# Altium PCB TvRRelayBoard_v2.PcbDoc
Units mil, origin at the board's own origin, x right, y up, seen from the top; angles counter-clockwise.
Board outline 2935 x 3395 mil, 2 copper layers (Top Layer, Bottom Layer); 29 components, 24 nets, 90 pads, 0 vias.
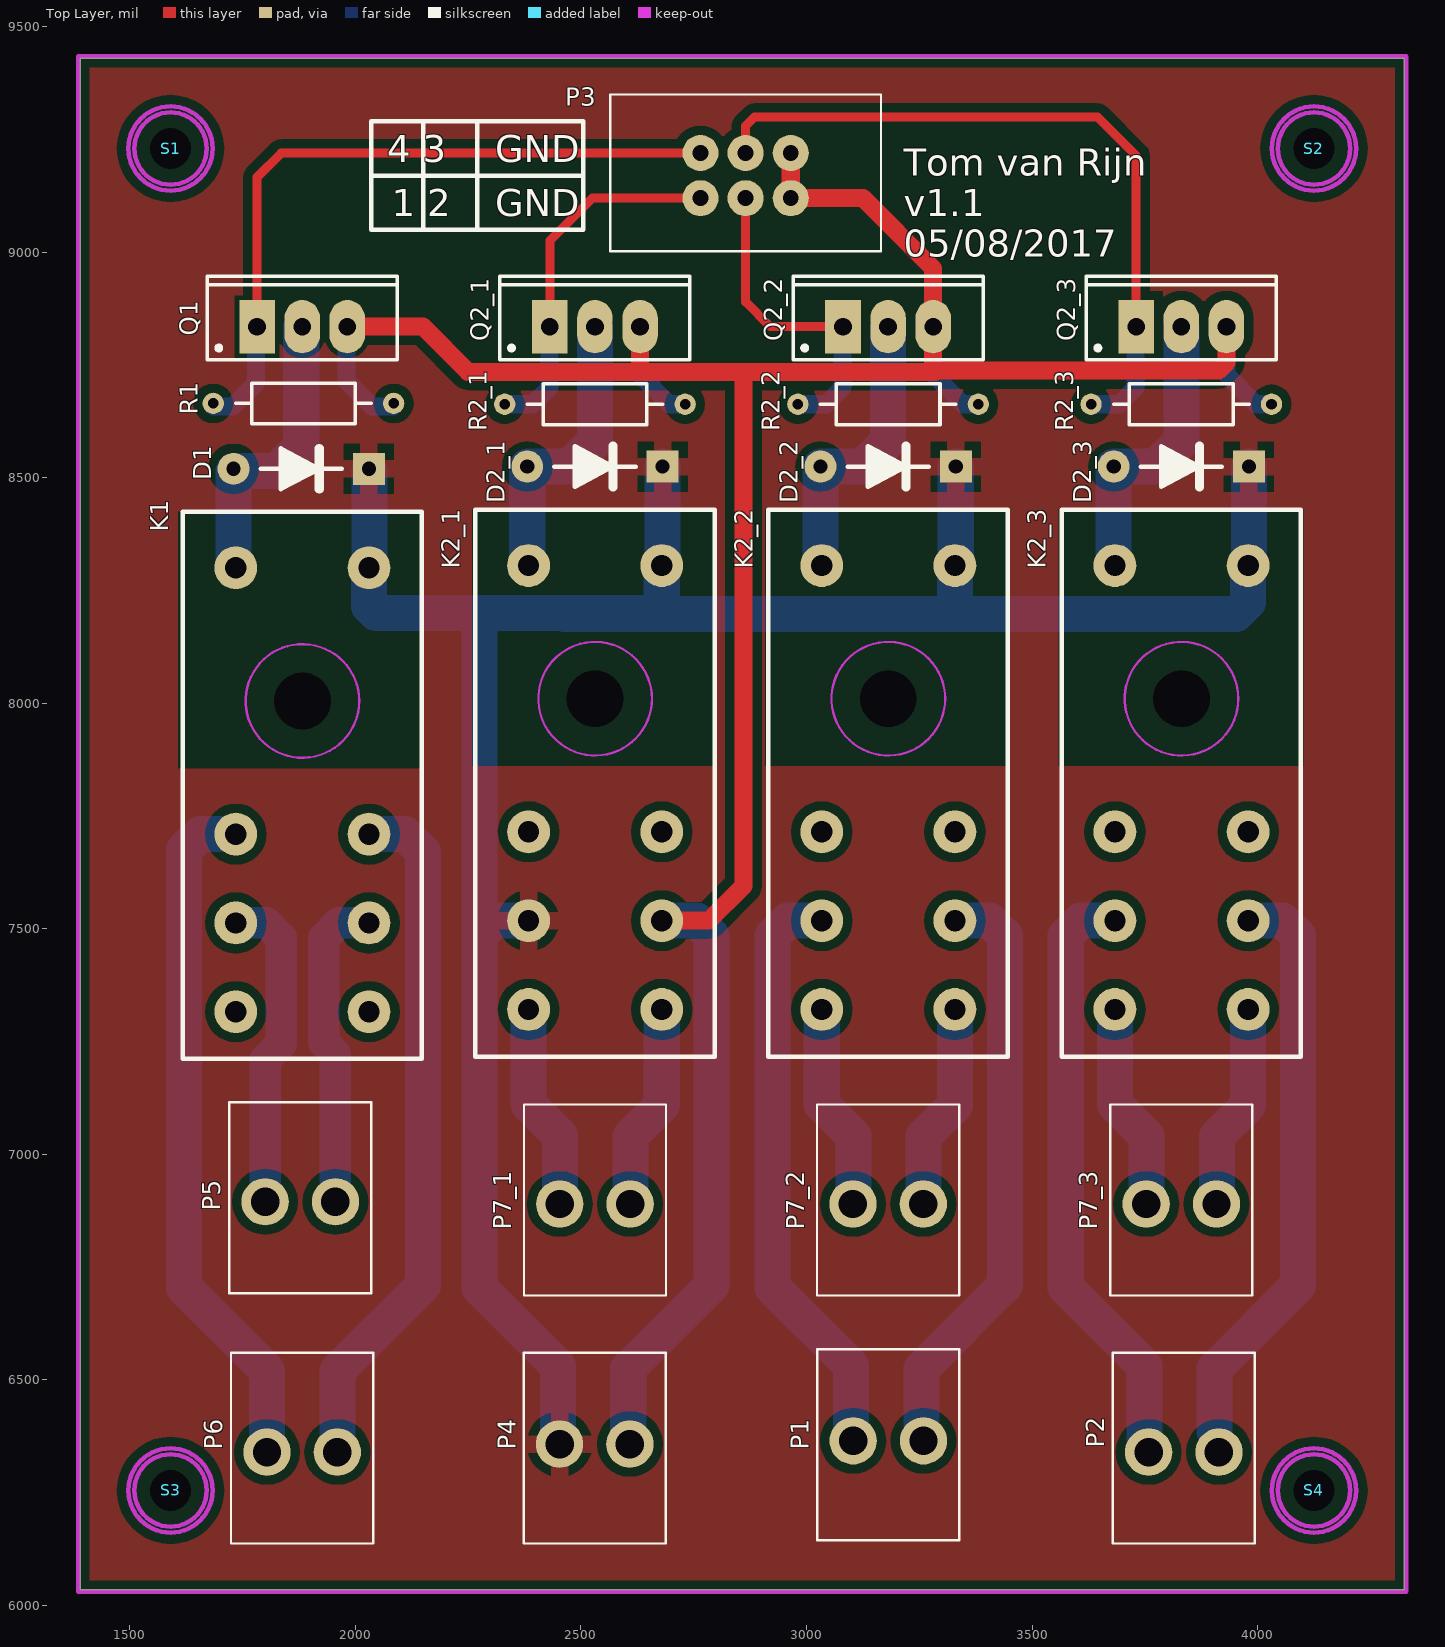
[diagram p0: Top Layer view]
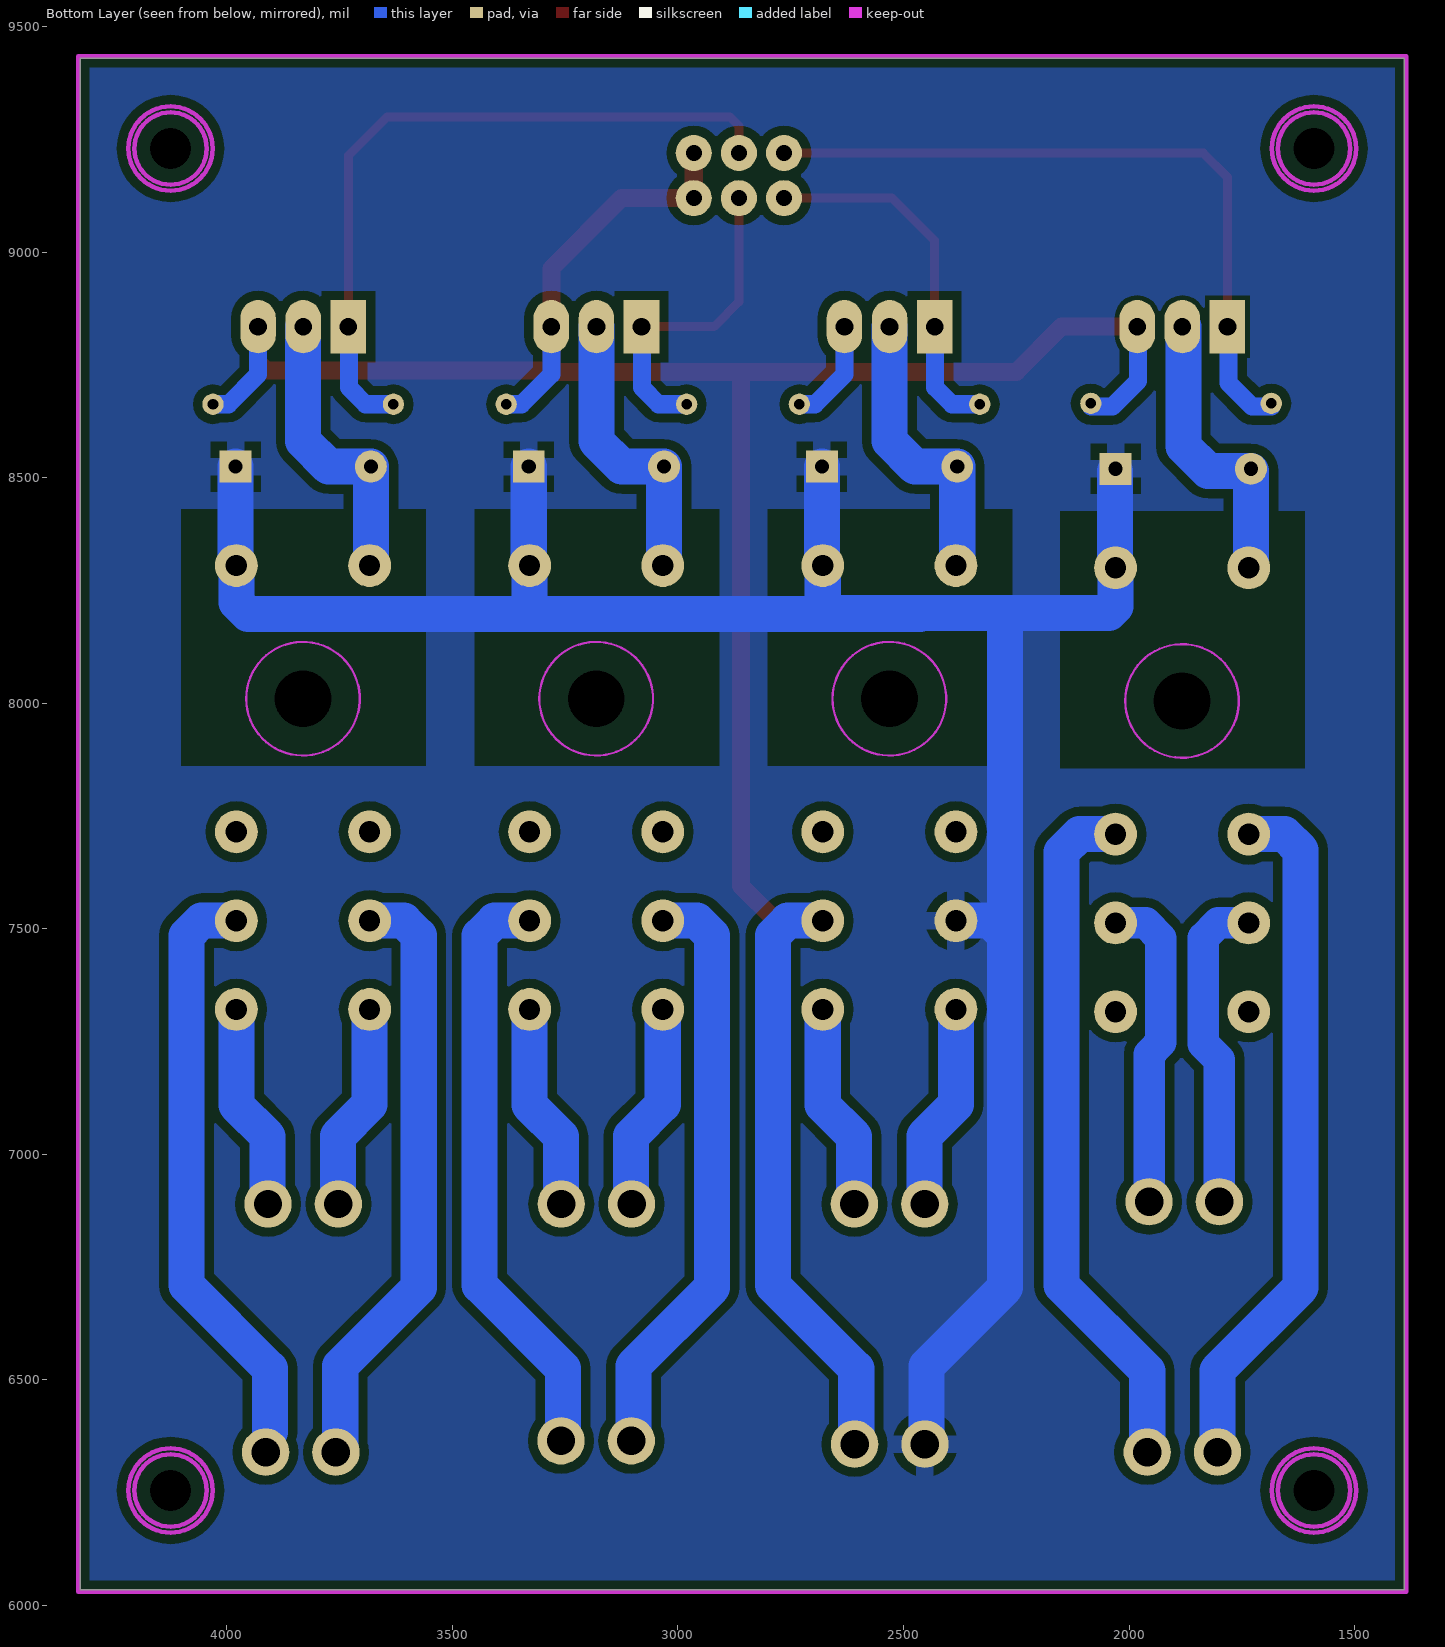
[diagram p1: Bottom Layer view, seen from below]
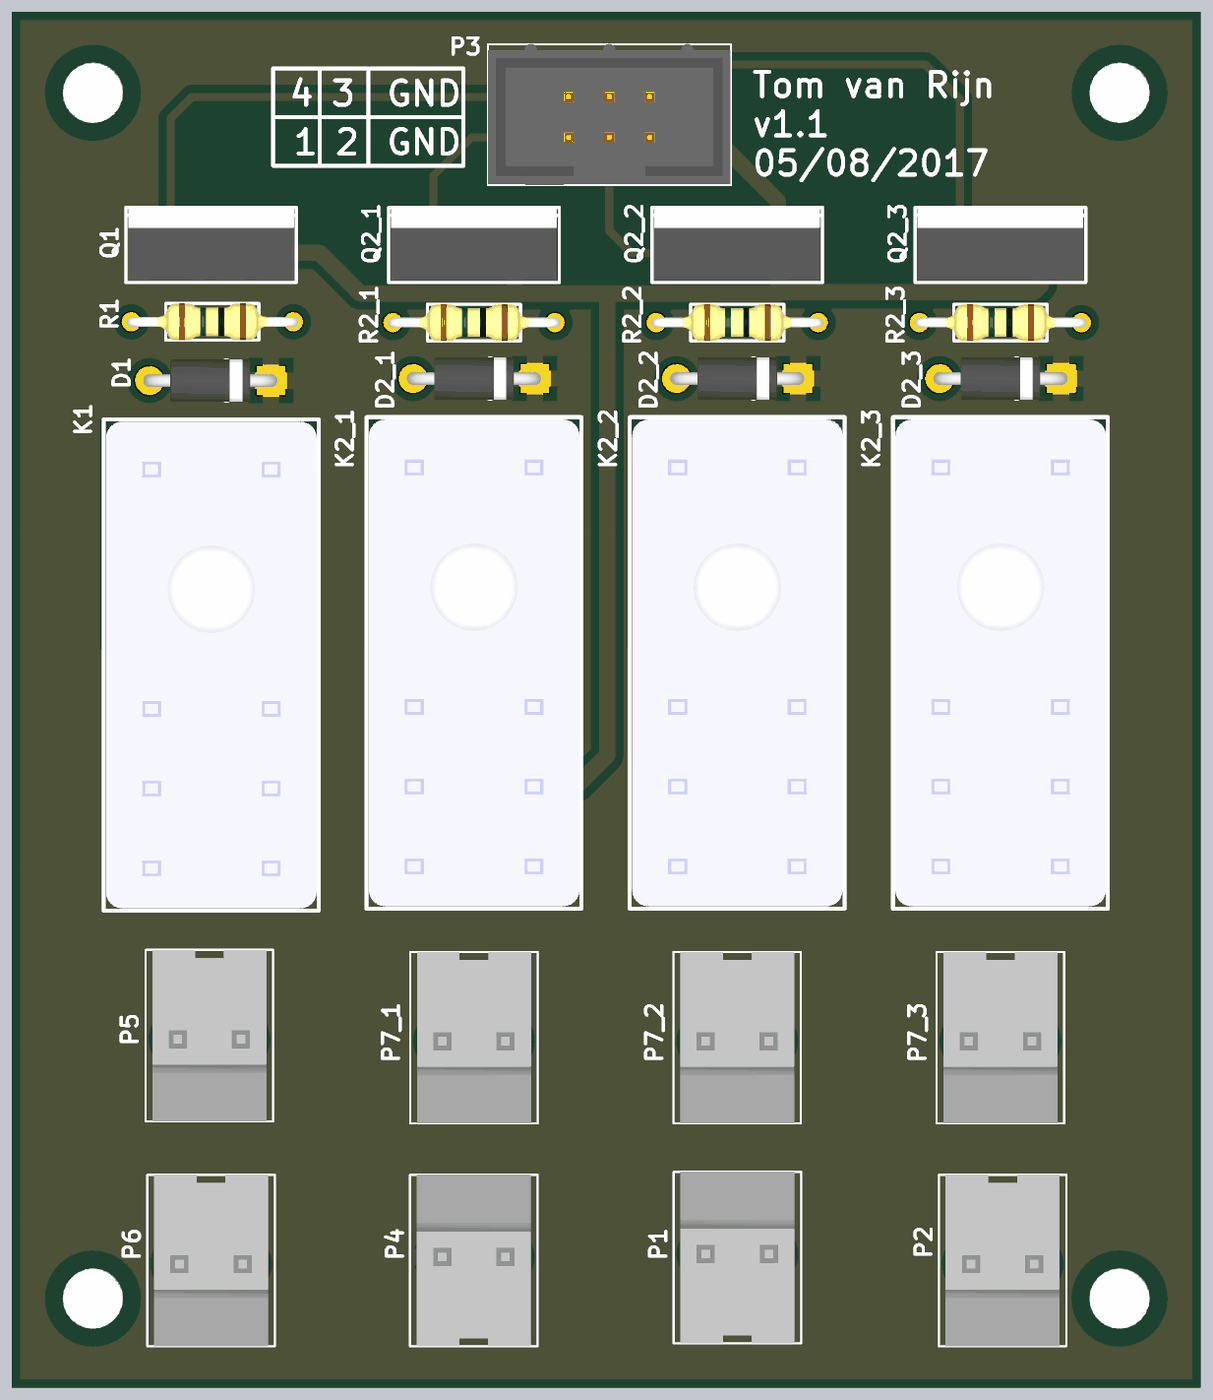
[diagram p2: 3D render of the assembled board from above, using the file's embedded part models]

## Layer stack, top to bottom
Top Solder: solder mask 0.4, Solder Resist, Dk 3.5
Top Layer: signal copper 1.4
Dielectric 1: dielectric 12.6, FR-4, Dk 4.8
Bottom Layer: signal copper 1.4
Bottom Solder: solder mask 0.4, Solder Resist, Dk 3.5

## Board outline
1390,6035 4325,6035 4325,9430 1390,9430

## Design rules (kind name [scope] priority, off if disabled: settings)
Clearance "Clearance MOSFET" [InComponent('Q1*')] p1: gap=10 ignorepadtopadclearanceinfootprint=FALSE except(0: Arc-Hole Track-Hole SMDPad-Hole THPad-Hole Via-Hole Fill-Hole Poly-Hole Region-Hole Text-Hole)
Clearance [All] p2: gap=20 ignorepadtopadclearanceinfootprint=FALSE except(18: Arc-Track Track-THPad)
HoleSize [All] p1: absolutevalues=TRUE maxlimit=157.48 minlimit=5.98 maxpercent=80.000 minpercent=20.000
MinimumSolderMaskSliver [All] p1: minsoldermaskwidth=0
PlaneConnect [All] p1: planeconnectstyle=Relief reliefexpansion=20 reliefentries=4 reliefconductorwidth=40 reliefairgap=20
PolygonConnect [All] p1: connectstyle=Relief reliefconductorwidth=40 reliefentries=4 polygonreliefangle="90 Angle" airgapwidth=20
RoomDefinition Relay_Conn [InComponentClass('Relay_Conn')] p1: confinementstyle=ConfineIn formatcopy=TRUE lockcomponents=FALSE outline 1390,6035 4320,6035 4320,9430 1390,9430
RoomDefinition R_NC [InComponentClass('R_NC')] p2: confinementstyle=ConfineIn formatcopy=TRUE lockcomponents=FALSE outline 1598.39,6125 2168.39,6125 2168.39,8960 1598.39,8960
RoomDefinition P3 [InComponentClass('P3')] p3: confinementstyle=ConfineIn formatcopy=TRUE lockcomponents=FALSE outline 3548.39,6125 4118.39,6125 4118.39,8960 3548.39,8960
RoomDefinition P2 [InComponentClass('P2')] p4: confinementstyle=ConfineIn formatcopy=TRUE lockcomponents=FALSE outline 2898.39,6125 3468.39,6125 3468.39,8960 2898.39,8960
RoomDefinition P1 [InComponentClass('P1')] p5: confinementstyle=ConfineIn formatcopy=TRUE lockcomponents=FALSE outline 2248.39,6125 2818.39,6125 2818.39,8960 2248.39,8960
RoutingVias [All] p1: holewidth=28 width=50 viastyle="Through Hole" minholewidth=28 minwidth=50 maxholewidth=28 maxwidth=50
SilkToSilkClearance [All] p1: silktosilkclearance=0
SilkToSolderMaskClearance [IsPad] p1: minsilkscreentomaskgap=0 clearancetoexposedcopper=TRUE
SolderMaskExpansion [All] p1: expansion=4
Width LED [InNetClass('LED')] p1 off: maxlimit=40 minlimit=20 preferedwidth=20
Width H-Bridge [InComponent('IC-Multiwatt-15')] p2 off: maxlimit=20 minlimit=20 preferedwidth=20
Width Fiducials-Width [HasFootprint('MECH-FID-ALL')] p3 off: maxlimit=10 minlimit=2 preferedwidth=10
Width Power [InNetClass('Power')] p4: maxlimit=80 minlimit=25 preferedwidth=80
Width [All] p5: maxlimit=40 minlimit=20 preferedwidth=20
25 further rules are at their usual default settings.

## Classes and differential pairs
channel class Relay_Schem_NO: P1 P2 P3
net class S[1..3]: S1 S2 S3 S4
net class Power: Drain Drain_1 Drain_2 Drain_3 GNDout_1 GNDout_2 GNDout_3 Vin1 Vin2 Vin2_1 VIN11 VIN12 VIN13 VIN21 VIN22 VIN23 Vout1 Vout2 Vout_1 Vout_2 Vout_3
component class Relay_Conn: P1 P2 P3 P4 S1 S2 S3 S4
component class R_NC: D1 K1 P5 P6 Q1 R1
component class P3: D2_3 K2_3 P7_3 Q2_3 R2_3
component class P2: D2_2 K2_2 P7_2 Q2_2 R2_2
component class P1: D2_1 K2_1 P7_1 Q2_1 R2_1

## Components (designator, comment, footprint, x,y, rotation, side; value= is the part's Value field where it differs from the comment)
D1 "1N4004" DIODE-0.3-SI 1879.72,8520 r0 top
D2_1 "1N4004" DIODE-0.3-SI 2530.87,8525 r0 top (schematic designator D2)
D2_2 "1N4004" DIODE-0.3-SI 3180.87,8525 r0 top (schematic designator D2)
D2_3 "1N4004" DIODE-0.3-SI 3830.87,8525 r0 top (schematic designator D2)
K1 "Relay-DPDT" "Relay_95.12 Socket - With Screw" 2030,7513.15 r270 top
K2_1 "Relay-DPDT" "Relay_95.12 Socket - With Screw" 2679,7518.15 r270 top (schematic designator K2)
K2_2 "Relay-DPDT" "Relay_95.12 Socket - With Screw" 3329,7518.15 r270 top (schematic designator K2)
K2_3 "Relay-DPDT" "Relay_95.12 Socket - With Screw" 3979,7518.15 r270 top (schematic designator K2)
P1 "RelayPowerIn1" CONN-WAFER-2x1 3103.39,6365 r0 top
P2 "RelayPowerIn2" CONN-WAFER-2x1 3914.29,6340 r180 top
P3 "Arduino" CONN-IDC-HARTING-2x3 2765,9120 r0 top
P4 "MainPowerIn" CONN-WAFER-2x1 2452.48,6357.71 r0 top
P5 "RelayPowerIn" CONN-WAFER-2x1 1955.63,6895 r180 top
P6 "RelayPowerOut" CONN-WAFER-2x1 1959.72,6340 r180 top
P7_1 "PowerOut" CONN-WAFER-2x1 2608.82,6890 r180 top (schematic designator P7)
P7_2 "PowerOut" CONN-WAFER-2x1 3258.82,6890 r180 top (schematic designator P7)
P7_3 "PowerOut" CONN-WAFER-2x1 3908.82,6890 r180 top (schematic designator P7)
Q1 "IRF540N" TO-220 1881.87,8835 r0 top
Q2_1 "IRF540N" TO-220 2530.87,8835 r0 top (schematic designator Q2)
Q2_2 "IRF540N" TO-220 3180.87,8835 r0 top (schematic designator Q2)
Q2_3 "IRF540N" TO-220 3830.87,8835 r0 top (schematic designator Q2)
R1 "10k" RES-0.4 1884.72,8665 r0 top
R2_1 "10k" RES-0.4 2530.87,8663.11 r0 top (schematic designator R2)
R2_2 "10k" RES-0.4 3180.87,8663.11 r0 top (schematic designator R2)
R2_3 "10k" RES-0.4 3830.87,8663.11 r0 top (schematic designator R2)
S1 "SCREW" MECH-SCREW-M2.3 1590,9230 r0 top
S2 "SCREW" MECH-SCREW-M2.3 4125,9230 r0 top
S3 "SCREW" MECH-SCREW-M2.3 1590,6255 r0 top
S4 "SCREW" MECH-SCREW-M2.3 4125,6255 r0 top

## Footprints (in the part's own frame and the unit in brackets; to place one, negate y for a bottom-side part, rotate by r counter-clockwise, add the part's x,y. Pads: shape width x height; smd on the part's side, far side on the other; paste and mask are expansions set on the pad)
CONN-IDC-HARTING-2x3 [mil] "IDC HArting 2x3 Socket 2.54mm"
  round 80 hole 35.43: 1(0,0) 2(0,100) 3(100,0) 4(100,100) 5(200,0) 6(200,100)
  silkscreen extent -200,-118 400,230, body extent -200,-117 400,231, height 361
CONN-WAFER-2x1 [mil] "Wafer Power Connector 2-pin 3.96mm pitch CH 3.96"
  round 105 hole 62.99: 1(0,0) 2(155.91,0)
  silkscreen extent -80,-220 235,203, body extent -82,-223 238,205, height 575
DIODE-0.3-SI [mm] "Axial Silicon Diode, Leads 0.3 inch spacing"
  round 1.8 hole 0.8: 1(-3.81,0)
  rect 1.8x1.8 hole 0.8: 2(3.81,0)
  silkscreen extent -2.29,-1.14 2.29,1.14, body extent -4.2,-1.33 4.2,1.33, height 3.06
MECH-SCREW-M2.3 [mm] "Screw M2.3"
  round 0 hole 2.3 unplated: 0(0,0)
  Keep-Out Layer circle w0.254: c0,0 r2.036
  Keep-Out Layer circle w0.254: c0,0 r2.373
  body extent -1.9,-1.9 1.9,1.9, height 2
"Relay_95.12 Socket - With Screw" [mm] "12VDC, 8A, DPDT Finder 40.52 Relay"
  round 0 hole 3.2 unplated: 0(-12.5,-3.75)
  round 2.413 hole 1.2: 1(0,0) 2(-5,0) 3(5,0) 4(0,-7.5) 5(-5,-7.5) 6(5,-7.5) 7(-20,0) 8(-20,-7.5)
  Keep-Out Layer circle w0.127: c-12.5,-3.75 r3.2
  silkscreen extent -23.15,-10.5 7.65,2.97, body extent -23,-10.35 7.5,2.85, height 9.2
RES-0.4 [mm] "Axial Resistor Thru-Hole; 2 Leads; 0.4 in Pin Spacing"
  round 1.2 hole 0.6: 1(-5.08,0) 2(5.08,0)
  silkscreen extent -3.81,-1.14 3.81,1.14, body extent -5.38,-1.16 5.38,1.16, height 2.93
TO-220 [mm] "TO, Thru-Hole, Vertical, Heatsink Mounted; 3 In-Line Leads; Pitch 2.54 mm"
  rect 2x3 hole 1: 1(-2.54,0)
  oval 2x3 hole 1: 2(0,0) 3(2.54,0)
  silkscreen extent -5.35,-1.85 5.35,2.85, body extent -5.2,-1.71 5.2,2.79, height 19

## Part data
D1 D2_1 D2_2 D2_3: library part "Diode 1N4005", "1 Amp General Purpose Rectifier", Code_JEDEC=DO-204-AL, ComponentLink1Description="Manufacturer Link", ComponentLink1URL=http://www.fairchildsemi.com/, ComponentLink2Description=Datasheet, ComponentLink2URL=http://www.fairchildsemi.com/ds/1N%2F1N4001.pdf, DatasheetVersion=1998, LatestRevisionDate=17-Jul-2002, LatestRevisionNote="Re-released for DXP Platform.", PackageDescription="Diode, Axial; Body 5.2 x 2.7 mm (LxDia. max), Lead Dia. 0.86 mm (max)", PackageReference=DO-41, PackageVersion=Aug-1999, Published=8-Jun-2000, Publisher="Altium Limited"
K1 K2_1 K2_2 K2_3: "Dual-Pole Dual-Throw Relay", LatestRevisionDate=17-Jul-2002, LatestRevisionNote="Re-released for DXP Platform.", PackageDescription="Relay; 8 Leads", PackageReference=DIP-P8, Published=24-Mar-1999, Publisher="Altium Limited"
P1 P2 P4 P5 P6 P7_1 P7_2 P7_3: library part "Header 2", "Header, 2-Pin", LatestRevisionDate=17-Jul-2002, LatestRevisionNote="Re-released for DXP Platform.", Publisher="Altium Limited"
P3: library part "Header 3X2", "Header, 3-Pin, Dual row", LatestRevisionDate=17-Jul-2002, LatestRevisionNote="Re-released for DXP Platform.", Publisher="Altium Limited"
Q1 Q2_1 Q2_2 Q2_3: library part MOSFET-N, "N-Channel MOSFET", LatestRevisionDate=17-Jul-2002, LatestRevisionNote="Re-released for DXP Platform.", PackageDescription="TO, Flat Index; 3 In-Line, Axial Leads; Body Dia. 4.6mm; Lead Dia. 0.5 mm (max)", PackageReference=E3, PackageVersion=1995/1996, Published=8-Jun-2000, Publisher="Altium Limited"
R1 R2_1 R2_2 R2_3: library part Res2, "Resistor", LatestRevisionDate=17-Jul-2002, LatestRevisionNote="Re-released for DXP Platform.", PackageDescription="Axial Device, Thru-Hole; 2 Leads; 0.4 in Pin Spacing", PackageReference=AXIAL-0.4, Published=8-Jun-2000, Publisher="Altium Limited"
S1 S2 S3 S4: "Screw to add to schematics in order for them not to be removed from PCB"

## Nets (pads, with @x,y where several pads share a name; then routed paths per layer and width w, separated by ;. In a path a pad name is that pad's centre, name@x,y a point inside that pad or via, vN(x,y) a via of type N, cw(c..) or ccw(c..) an arc to the next point about the centre after c; other vN are vias at no path point)
Drain: D1.1 K1.8 Q1.2 | length 654.3
  Bottom Layer w80: K1.8 1729.72,8305.55 1729.72,8515 1824.72,8515 1879.72,8570 Q1.2@1879.72,8835
Drain_1: D2_1.1 K2_1.8 Q2_1.2 | length 647.7
  Bottom Layer w25: K2_1.8@2380.87,8308.41 K2_1.8
  Bottom Layer w80: K2_1.8@2380.87,8308.41 D2_1.1 2474.72,8525 2530.87,8581.14 Q2_1.2
Drain_2: D2_2.1 K2_2.8 Q2_2.2 | length 647.7
  Bottom Layer w25: K2_2.8@3030.87,8308.41 K2_2.8
  Bottom Layer w80: K2_2.8@3030.87,8308.41 D2_2.1 3124.72,8525 3180.87,8581.14 Q2_2.2
Drain_3: D2_3.1 K2_3.8 Q2_3.2 | length 647.7
  Bottom Layer w25: K2_3.8@3680.87,8308.41 K2_3.8
  Bottom Layer w80: K2_3.8@3680.87,8308.41 D2_3.1 3774.72,8525 3830.87,8581.14 Q2_3.2
GNDout_1: K2_1.3 P7_1.1 | length 460
  Bottom Layer w80: P7_1.1@2609.72,6890 2609.72,7040 2679,7109.27 K2_1.3
GNDout_2: K2_2.3 P7_2.1 | length 460
  Bottom Layer w80: P7_2.1@3259.72,6890 3259.72,7040 3329,7109.27 K2_2.3
GNDout_3: K2_3.3 P7_3.1 | length 460
  Bottom Layer w80: P7_3.1@3909.72,6890 3909.72,7040 3979,7109.27 K2_3.3
S1: P3.1 Q2_1.1 R2_1.1 | length 813.6
  Top Layer w20: Q2_1.1 2430.87,9025.87 2525,9120 P3.1
  Bottom Layer w40: R2_1.1 2392.84,8663.11 2429.72,8700 2429.72,8833.86 Q2_1.1
S2: P3.3 Q2_2.1 R2_2.1 | length 718.3
  Top Layer w20: P3.3 2865,8890 2920,8835 Q2_2.1
  Bottom Layer w40: R2_2.1 3042.84,8663.11 3079.72,8700 3079.72,8833.86 Q2_2.1
S3: P3.4 Q2_3.1 R2_3.1 | length 1598.5
  Top Layer w20: P3.4 2865,9280 2885,9300 3645,9300 3730.87,9214.13 Q2_3.1
  Bottom Layer w40: R2_3.1 3692.84,8663.11 3729.72,8700 3729.72,8833.86 Q2_3.1
S4: P3.2 Q1.1 R1.1 | length 1578.5
  Top Layer w20: Q1.1 1781.87,9166.87 1835,9220 P3.2
  Bottom Layer w40: R1.1@1684.72,8658.11 1727.84,8658.11 1779.72,8710 Q1.1@1779.72,8835
Vin1: K1.4 P5.2 | length 713.8
  Bottom Layer w70: K1.4 1801.85,7513.15 1835.22,7479.78 1835.22,7245.22 1799.72,7209.72 P5.2
Vin2: K1.1 P5.1 | length 709.8
  Bottom Layer w70: P5.1 1955.63,7222.41 1929.5,7248.54 1929.5,7479.5 1963.15,7513.15 K1.1
VIN11: D1.2 D2_1.2 D2_2.2 D2_3.2 K1.7 K2_1.4 K2_1.7 K2_2.7 K2_3.7 P4.1 | length 5478.6
  Bottom Layer w25: K1.7@2030,8296.56 K1.7@2030.87,8297.42 ; K2_1.7 K2_1.7@2680.87,8307.42 ; K2_2.7 K2_2.7@3330.87,8307.42 ; K2_3.7 K2_3.7@3980.87,8307.42
  Bottom Layer w80: K1.7 2030,8296.56 2030,8215.1 2045.05,8200.05 2275,8200.05 ; K1.7@2030.87,8297.42 D1.2@2030.87,8515 ; K2_1.4 2307.87,7518.15 2274.72,7485 ; P4.1@2448.82,6360 2448.82,6530.91 2274.72,6705 2274.72,7485 ; 2463.29,8197.67 3315,8197.67 ; K2_1.7 2679,8206.66 2672.38,8200.05 2275,8200.05 ; K2_1.7@2680.87,8307.42 D2_1.2 ; K2_2.7 3329,8211.66 3315,8197.67 ; K2_2.7@3330.87,8307.42 D2_2.2 ; K2_3.7 3979,8224 3952.67,8197.67 3315,8197.67 ; K2_3.7@3980.87,8307.42 D2_3.2 ; 2274.72,7485 2274.72,8199.78 2275,8200.05
VIN12: K2_2.4 P1.1 | length 1319.8
  Bottom Layer w80: K2_2.4 2957.87,7518.15 2924.72,7485 2924.72,6705 3098.82,6530.91 P1.1@3098.82,6360
VIN13: K2_3.4 P2.2 | length 1319.8
  Bottom Layer w80: K2_3.4 3607.87,7518.15 3574.72,7485 3574.72,6705 3748.82,6530.91 P2.2@3748.82,6360
VIN21: K2_1.1 P3.5 P3.6 P4.2 Q1.3 Q2_1.3 Q2_2.3 Q2_3.3 R1.2 R2_1.2 R2_2.2 R2_3.2 | length 6498.3
  Top Layer w40: Q1.3 2150,8835 2250,8735 2620,8735 ; Q2_1.3 2630.87,8745.87 2620,8735 ; K2_1.1 2783.15,7518.15 2860,7595 2860,8735 ; P3.6 P3.5 3125,9120 3280.87,8964.13 Q2_2.3 3280.87,8739.13 3282.06,8737.94 ; Q2_3.3 3930.87,8755.87 3912.94,8737.94 3282.06,8737.94 ; 2620,8735 2860,8735 ; 2860,8735 3285,8735 3282.06,8737.94
  Bottom Layer w40: Q1.3@1979.72,8835 1979.72,8715 2036.61,8658.11 R1.2@2084.72,8658.11 ; Q2_1.3 2630.87,8728.86 2696.61,8663.11 R2_1.2 ; Q2_2.3 3280.87,8728.86 3346.61,8663.11 R2_2.2 ; Q2_3.3 3930.87,8728.86 3996.61,8663.11 R2_3.2
  Bottom Layer w80: P4.2@2604.72,6385 2604.72,6525 2789.72,6710 2789.72,7485 2756.57,7518.15 K2_1.1
VIN22: K2_2.1 P1.2 | length 1301.1
  Bottom Layer w80: P1.2@3254.72,6385 3254.72,6525 3439.72,6710 3439.72,7485 3406.57,7518.15 K2_2.1
VIN23: K2_3.1 P2.1 | length 1301.1
  Bottom Layer w80: P2.1@3904.72,6385 3904.72,6525 4089.72,6710 4089.72,7485 4056.57,7518.15 K2_3.1
Vout1: K1.5 P6.2 | length 1510.4
  Bottom Layer w80: K1.5 1655,7710 1620,7675 1620,6705 1803.82,6521.18 P6.2@1803.82,6370
Vout2: K1.2 P6.1 | length 1545.4
  Bottom Layer w80: P6.1 1959.72,6519.72 2150,6710 2150,7670 2110,7710 K1.2
Vout_1: K2_1.6 P7_1.2 | length 460.3
  Bottom Layer w80: K2_1.6 2383.72,7111 2453.82,7040.91 P7_1.2@2453.82,6890
Vout_2: K2_2.6 P7_2.2 | length 460.3
  Bottom Layer w80: K2_2.6 3033.72,7111 3103.82,7040.91 P7_2.2@3103.82,6890
Vout_3: K2_3.6 P7_3.2 | length 460.3
  Bottom Layer w80: K2_3.6 3683.72,7111 3753.82,7040.91 P7_3.2@3753.82,6890
pads on no net: K1.0 K1.3 K1.6 K2_1.0 K2_1.2 K2_1.5 K2_2.0 K2_2.2 K2_2.5 K2_3.0 K2_3.2 K2_3.5 S1.0 S2.0 S3.0 S4.0

## Polygon pours and split planes (outlines as drawn)
VIN11 on Bottom Layer "Bottom Layer-GND" (solid, remove dead copper, pour order 0): 1390,9430 1390,6035 4325,6035 4325,9430
VIN11 on Top Layer "Top Layer-GND" (solid, remove dead copper, pour order 2): 1390,9430 1390,6035 4325,6035 4325,9430

## Keep-outs
Top Layer:
  lines w10: 1385,6030 1385,9435 4330,9435 4330,6030 1385,6030
Bottom Layer:
  lines w10: 1385,6030 1385,9435 4330,9435 4330,6030 1385,6030

## Other copper
Top Layer:
  pour cut-out: 1607.6,8425.12 2149.6,8425.12 2149.6,7856.06 1607.61,7856.06
  pour cut-out: 3558.96,8430.4 4100.96,8430.4 4100.96,7861.34 3558.96,7861.34
  pour cut-out: 2908.96,8430.4 3450.96,8430.4 3450.96,7861.34 2908.96,7861.34
  pour cut-out: 2258.96,8430.4 2800.96,8430.4 2800.96,7861.34 2258.96,7861.34
Bottom Layer:
  pour cut-out: 3558.96,8430.4 4100.96,8430.4 4100.96,7861.34 3558.96,7861.34
  pour cut-out: 2908.96,8430.4 3450.96,8430.4 3450.96,7861.34 2908.96,7861.34
  pour cut-out: 2258.96,8430.4 2800.96,8430.4 2800.96,7861.34 2258.96,7861.34
  pour cut-out: 1609.96,8425.4 2151.96,8425.4 2151.96,7856.34 1609.96,7856.34

## Silkscreen, mask and mechanical layers (free items; w line width, h text height)
Top Overlay:
  lines w10: 2035,9170 2505,9170 ; 2150,9050 2150,9290 ; 2270,9050 2270,9290 ; 2035,9050 2035,9290 2505,9290 2505,9050 2035,9050
  text "4 3" at 2070,9200 h60
  text "GND" at 2310,9200 h60
  text "1 2" at 2080,9080 h60
  text "GND" at 2310,9080 h60
  text "Tom van Rijn / v1.1 / 05/08/2017" at 3215,8990 h60
BoardOutline:
  the board outline again, w10